# Altium PCB HalfPCB2.PcbDoc
Units mm, origin at the board's own origin, x right, y up, seen from the top; angles counter-clockwise.
Board outline 50.04 x 25.02 mm, 4 copper layers (Top Layer, Mid-Layer 1, Mid-Layer 2, Bottom Layer); 57 components, 74 nets, 214 pads, 79 vias.
Unrouted connection lines stored in the file: 3.
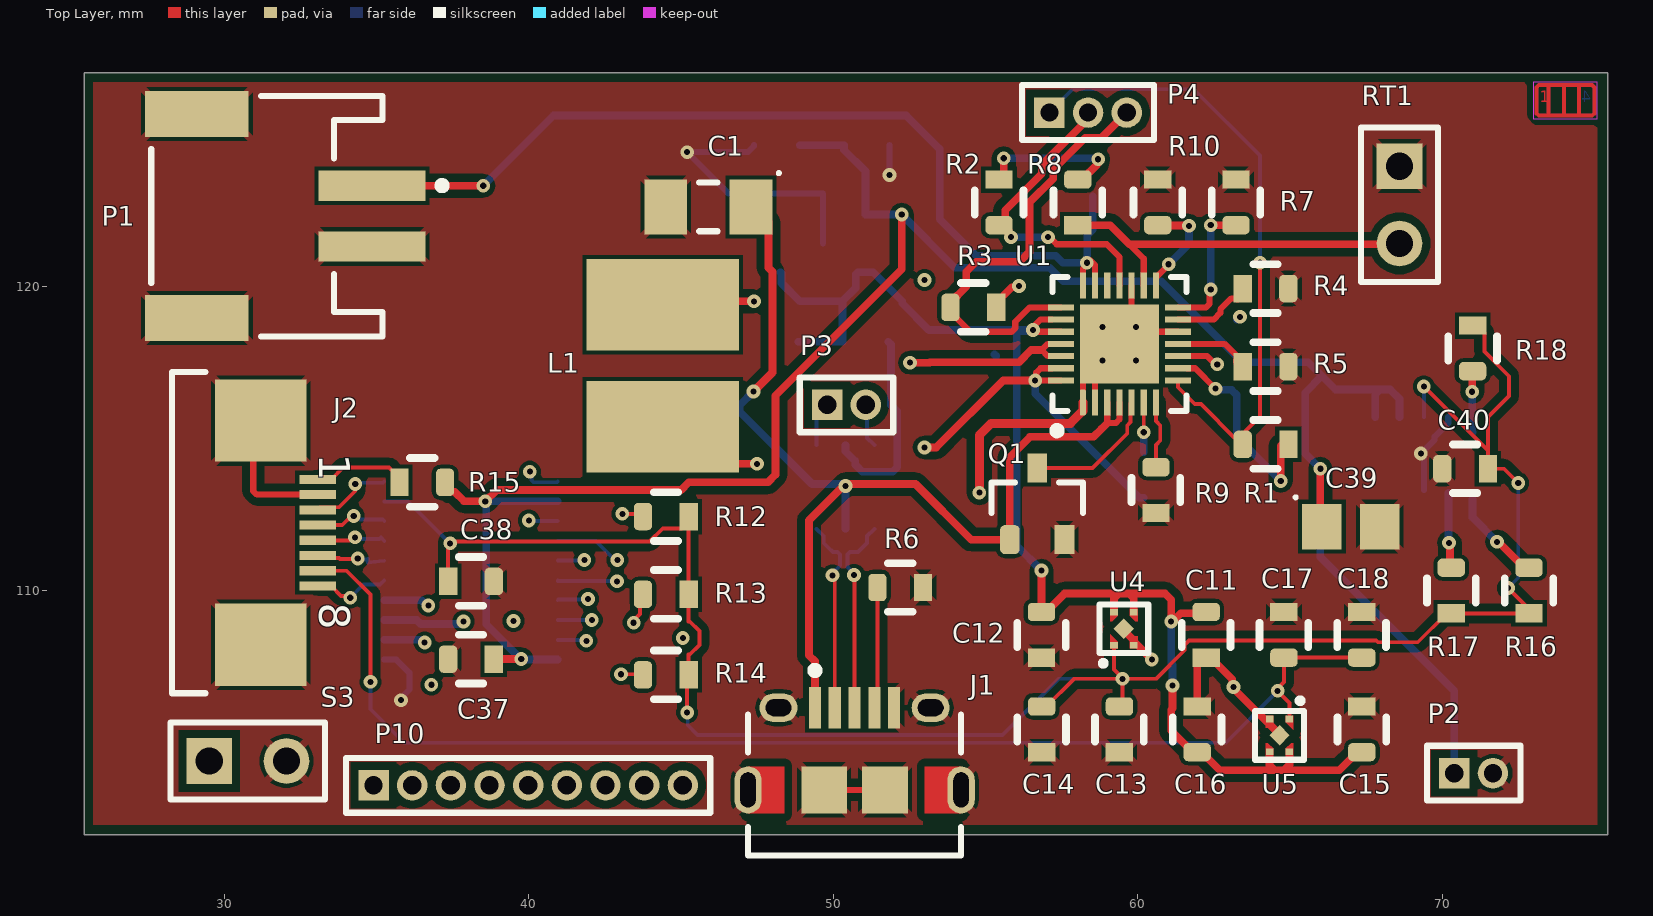
[diagram p0: Top Layer view]
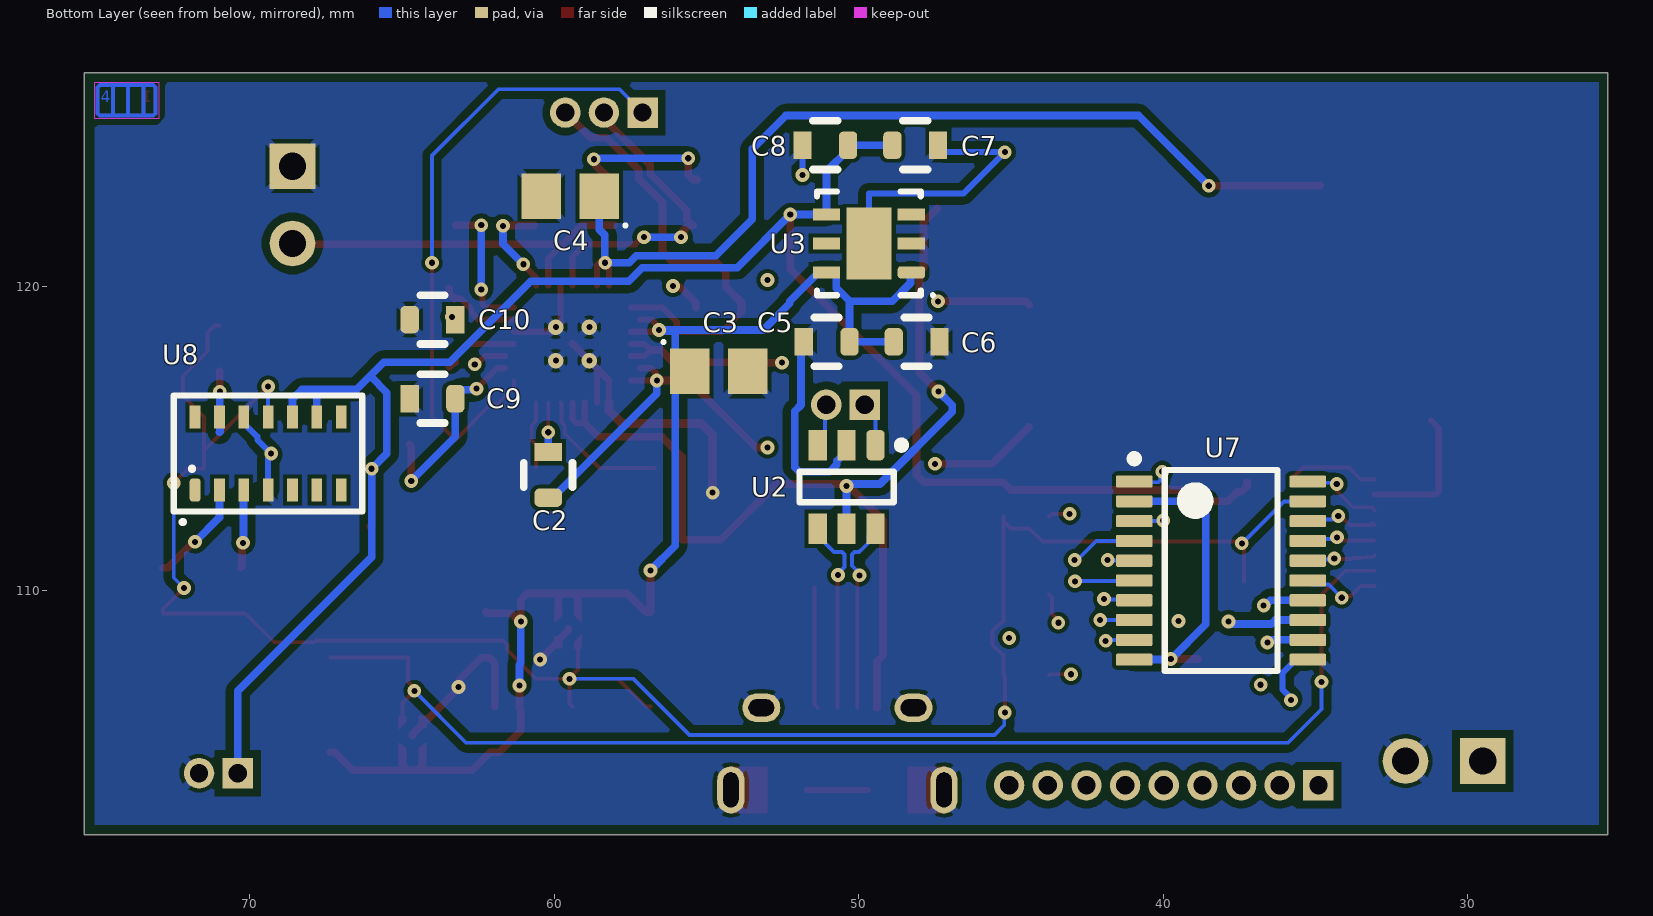
[diagram p1: Bottom Layer view, seen from below]
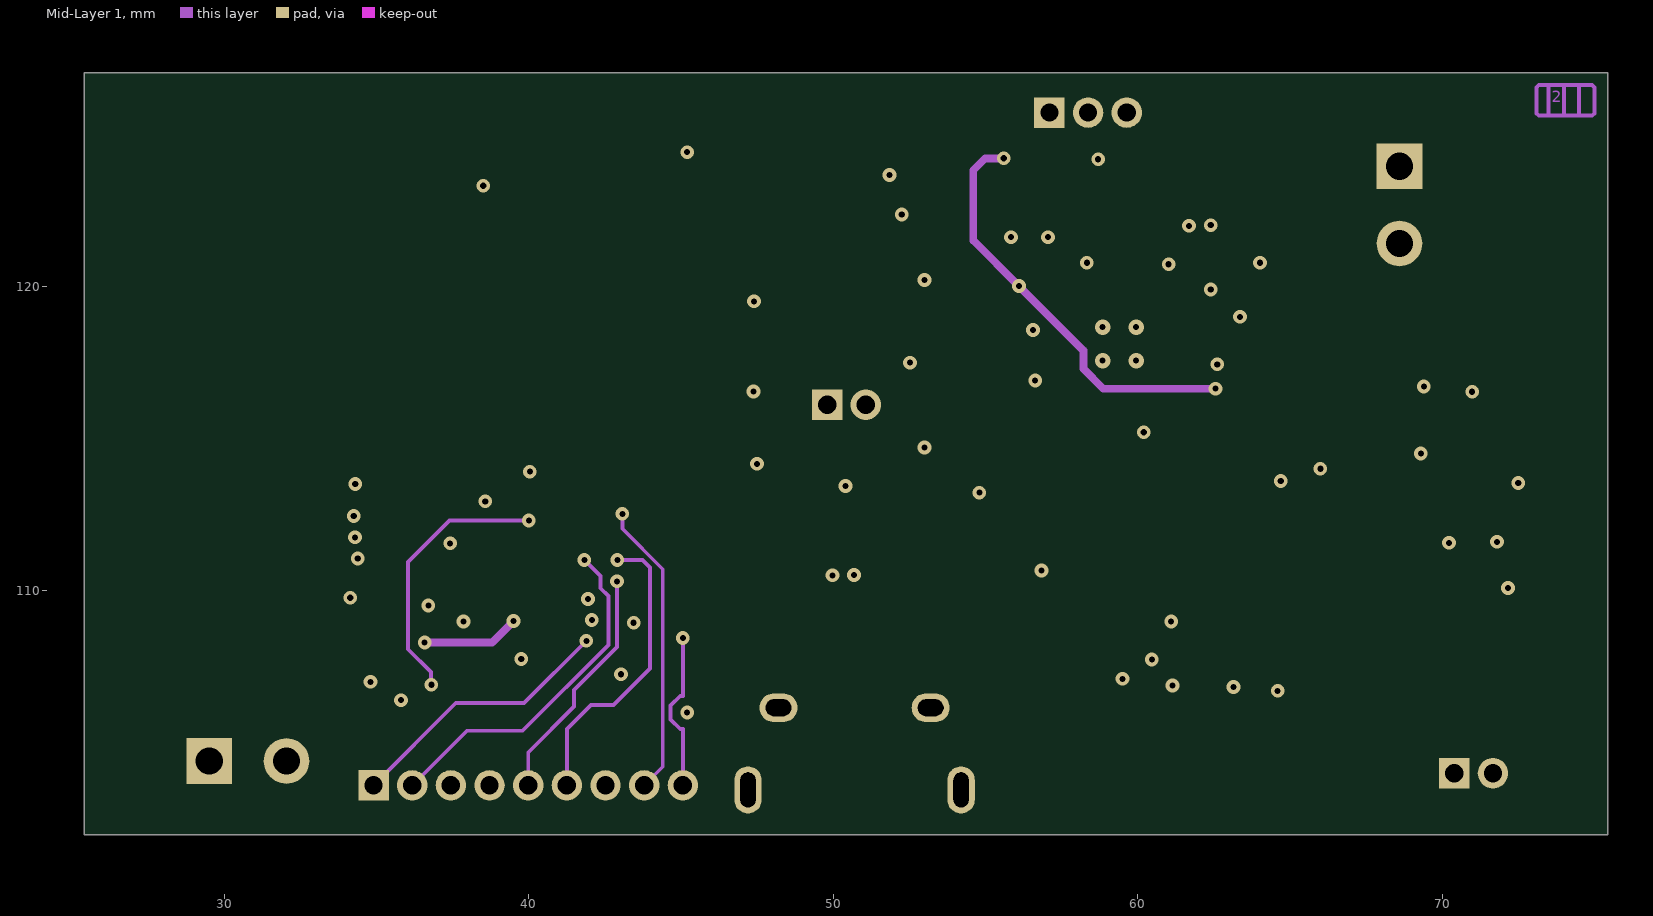
[diagram p2: Mid-Layer 1]
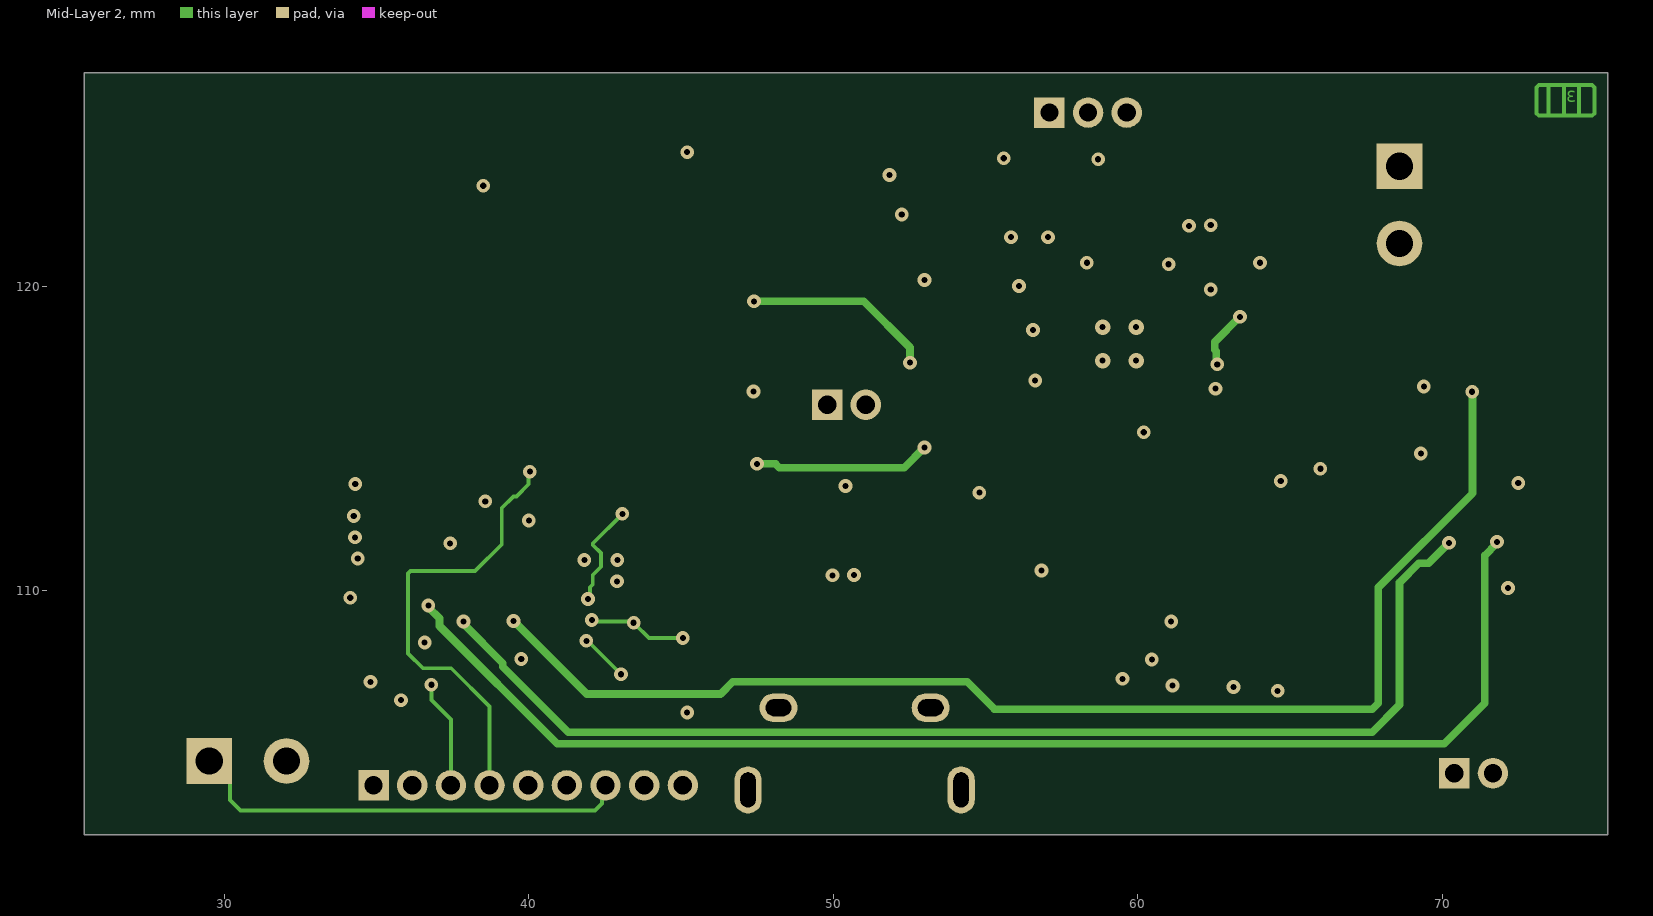
[diagram p3: Mid-Layer 2]
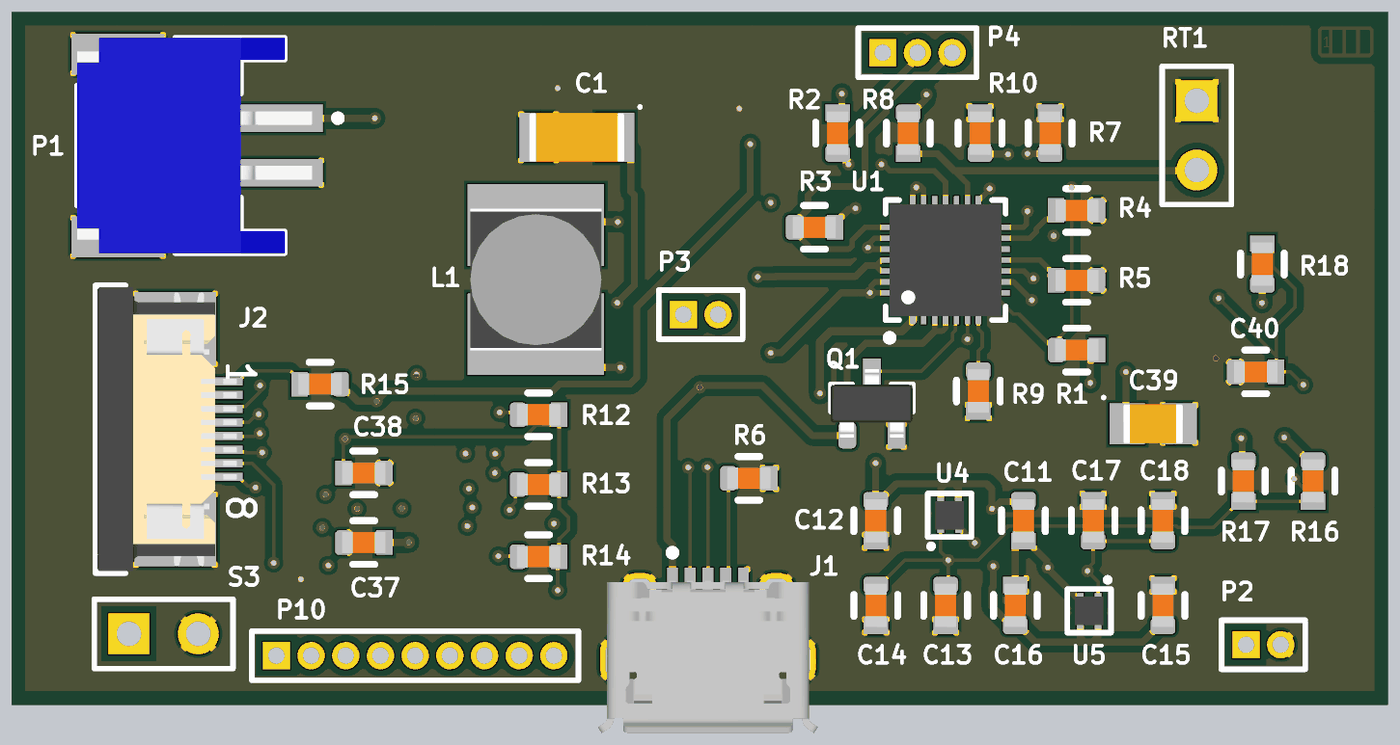
[diagram p4: 3D render of the assembled board from above, using the file's embedded part models]
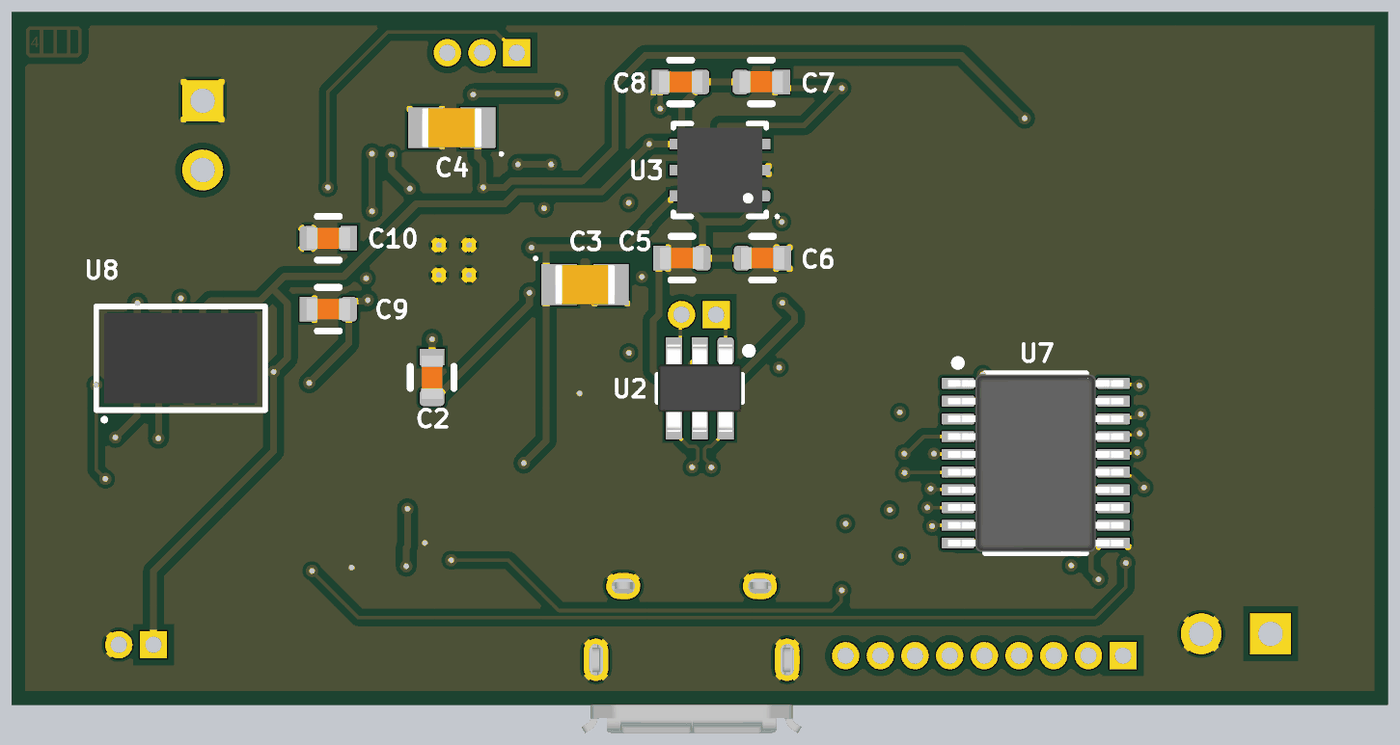
[diagram p5: 3D render of the assembled board from below, using the file's embedded part models]

## Layer stack, top to bottom
Top Solder: solder mask 0.0102, Solder Resist, Dk 3.5
Top Layer: signal copper 0.0356
Dielectric 1: dielectric 0.32, FR-4, Dk 4.8
Mid-Layer 1: signal copper 0.0356
Dielectric3: dielectric 0.32, FR-4, Dk 4.8
Mid-Layer 2: signal copper 0.0356
Dielectric2: dielectric 0.32, FR-4, Dk 4.8
Bottom Layer: signal copper 0.0356
Bottom Solder: solder mask 0.0102, Solder Resist, Dk 3.5

## Board outline
25.4,101.981 75.438,101.981 75.438,127 25.4,127

## Design rules (kind name [scope] priority, off if disabled: settings)
Clearance [All] p1: gap=0.254 ignorepadtopadclearanceinfootprint=TRUE except(0: Arc-Hole Track-Hole SMDPad-Hole THPad-Hole Via-Hole Fill-Hole Poly-Hole Region-Hole Text-Hole; 0.127: Arc-Arc Arc-Track Arc-Poly Track-Track SMDPad-SMDPad SMDPad-Poly SMDPad-Region THPad-Region Via-Fill Via-Poly; 0.2: Arc-SMDPad Arc-THPad Track-SMDPad Track-THPad SMDPad-Via; 0.5: THPad-THPad)
DiffPairsRouting [All] p1: maxlimit=0.254 minlimit=0.127 mostfreqgap=0.127 toplayer_minwidth=0.127 toplayer_maxwidth=0.381 toplayer_prefwidth=0.127 midlayer1_minwidth=0.127 midlayer1_maxwidth=0.381 midlayer1_prefwidth=0.127 midlayer2_minwidth=0.127 midlayer2_maxwidth=0.381 midlayer2_prefwidth=0.127 bottomlayer_minwidth=0.127 bottomlayer_maxwidth=0.381 bottomlayer_prefwidth=0.127 maxuncoupledlength=12.7
HoleSize [All] p1: absolutevalues=TRUE maxlimit=6.3 minlimit=0.2 maxpercent=80.000 minpercent=20.000
HoleToHoleClearance [All] p1: gap=0.5 allowstackedmicrovias=TRUE
MinimumSolderMaskSliver [All] p1: minsoldermaskwidth=0.1
PlaneClearance [All] p1: clearance=0.254
PlaneConnect [All] p1: planeconnectstyle=Relief reliefexpansion=0.508 reliefentries=4 reliefconductorwidth=0.254 reliefairgap=0.127
PolygonConnect PolygonConnect_2 [All vs (InNamedPolygon('GND_L01_P003') AND InNamedUnion('Via Stitchings'))] p1: connectstyle=Direct reliefconductorwidth=0.254 reliefentries=4 polygonreliefangle="90 Angle" airgapwidth=0.254
PolygonConnect PolygonConnect_1 [All vs (InNamedPolygon('GND_L01_P003') AND InNamedUnion('Via Stitchings'))] p2: connectstyle=Direct reliefconductorwidth=0.254 reliefentries=4 polygonreliefangle="90 Angle" airgapwidth=0.254
PolygonConnect [All] p3: connectstyle=Relief reliefconductorwidth=0.254 reliefentries=4 polygonreliefangle="45 Angle" airgapwidth=0.127
RoomDefinition U_IO [InComponentClass('U_IO')] p1: confinementstyle=ConfineIn formatcopy=TRUE lockcomponents=FALSE outline 27.686,102.235 74.295,102.235 74.295,119.634 27.686,119.634
RoomDefinition U_Power [InComponentClass('U_Power')] p2: confinementstyle=ConfineIn formatcopy=TRUE lockcomponents=FALSE outline 26.924,100.33 73.025,100.33 73.025,127 26.924,127
RoutingVias [All] p1: holewidth=0.3 width=0.5 viastyle="Through Hole" minholewidth=0.2 minwidth=0.45 maxholewidth=6.3 maxwidth=6.45
SilkToSolderMaskClearance [IsPad] p1: minsilkscreentomaskgap=0.02 clearancetoexposedcopper=TRUE
SolderMaskExpansion [All] p1: expansion=0.05 istentingtop=FALSE
UnRoutedNet [All] p1: checkbadconnections=TRUE
Width [All] p1: maxlimit=2 minlimit=0.127 preferedwidth=0.254
22 further rules are at their usual default settings.

## Classes and differential pairs
component class U_Power: C1 C2 C3 C4 C5 C6 C7 C8 C9 C10 C11 C12 C13 C14 C15 C16 C17 C18 J1 L1 P1 P2 P3 P4 Q1 R1 R2 R3 R4 R5 R6 R7 R8 R9 R10 RT1 U1 U2 U3 U4 U5
component class U_IO: C37 C38 C39 C40 J2 P10 R12 R13 R14 R15 R16 R17 R18 S3 U7 U8
differential pair USB: +USB_P -USB_N
differential pair USBSTM: +USBSTM_P -USBSTM_N
differential pair USBIN: +USBIN_P -USBIN_N

## Components (designator, comment, footprint, x,y, rotation, side; value= is the part's Value field where it differs from the comment)
C1 "4.7uF" C_1206 45.9,122.6 r0 top
C2 "100nF" C_0603 60.2,113.8 r90 bottom
C3 "10uF" C_0805 54.6,117.2 r0 bottom
C4 "10uF" C_0805 59.477,122.953 r180 bottom
C5 "100nF" C_0603 51.054,118.171 r0 bottom
C6 "1uF" C_0603 48.1,118.171 r180 bottom
C7 "1uF" C_0603 48.146,124.629 r180 bottom
C8 "100nF" C_0603 51.1,124.629 r0 bottom
C9 "1uF" C_0603 64,116.3 r0 bottom
C10 "150nF" C_0603 64,118.9 r180 bottom
C11 "100nF" C_0603 62.25,108.546 r270 top
C12 "1uF" C_0603 56.842,108.546 r270 top
C13 "1uF" C_0603 56.846,105.441 r270 top
C14 "100nF" C_0603 59.4,105.441 r270 top
C15 "100nF" C_0603 67.363,105.441 r90 top
C16 "1uF" C_0603 61.954,105.441 r90 top
C17 "1uF" C_0603 64.804,108.546 r90 top
C18 "100nF" C_0603 67.359,108.546 r90 top
C37 "100nF" C_0603 38.1,107.746 r0 top
C38 "100nF" C_0603 38.1,110.3 r180 top
C39 "10uF" C_0805 67,112.1 r180 top
C40 "1uF" C_0603 70.754,114 r0 top
J1 "MicroUSB" FCI-10118194-0001LF-5_V 50.7,104.8 r0 top
J2 "68710814522" 68710814522 30.5,111.9 r270 top
L1 "10mH" L_0503 44.4,117.384 r270 top
P1 "JST-PH" "JST- S2B-PH-SM4-TB(LF)(SN)-2_V" 31.4,122.3 r270 top
P2 "PWR" MHDR1X2 70.4,104 r0 top
P3 "UART" MHDR1X2 49.8,116.1 r0 top
P4 "BAT" MHDR1X3 57.1,125.7 r0 top
P10 "MHDR1X9" MHDR1X9 34.9,103.6 r0 top
Q1 "PMV37ENEAR" SOT23-3P90R290x240-N2 56.7,112.846 r90 top
R1 "10K" C_0603 64.2,114.8 r0 top
R2 "10K" C_0603 55.446,122.75 r90 top
R3 "10K" C_0603 54.6,119.3 r0 top
R4 "1K2" C_0603 64.2,119.919 r180 top
R5 "3K" C_0603 64.2,117.354 r180 top
R6 "10K" C_0603 52.2,110.1 r0 top
R7 "10K" C_0603 63.23,122.75 r90 top
R8 "10K" C_0603 58.033,122.75 r270 top
R9 "10K" C_0603 60.6,113.3 r270 top
R10 "10K" C_0603 60.662,122.75 r90 top
R12 "4K7" C_0603 44.5,112.429 r0 top
R13 "4K7" C_0603 44.5,109.875 r0 top
R14 "4K7" C_0603 44.5,107.229 r0 top
R15 "10K" C_0603 36.5,113.554 r180 top
R16 "4K7" C_0603 72.854,110 r270 top
R17 "4K7" C_0603 70.3,110 r270 top
R18 "4K7" C_0603 71,117.954 r90 top
RT1 "NTC" HDR1X2 68.6,123.94 r270 top
S3 "USR-BTN" HDR1X2 29.5,104.4 r0 top
U1 "MAX8903A" QFN28P40S400X400EP260x260 59.4,118.1 r90 top
U2 "USBLC6-2" SOT23-6P95R280X90 50.4,113.4 r270 bottom
U3 "LD39050PU33R" SON6P95S300X300EP237x149 49.665,121.4 r0 bottom
U4 "MIC5502-1.8YMT" DFN4P65S100x100EP48x48 59.546,108.746 r0 top
U5 "MIC5502-2.8YMT" DFN4P65S100x100EP48x48 64.659,105.241 r180 top
U7 "TXB0108PWR" PW0020A_L 38.1,110.654 r180 bottom
U8 "MAX3010x" OESIP14R560x330 69.4,114.5 r90 bottom

## Footprints (in the part's own frame and the unit in brackets; to place one, negate y for a bottom-side part, rotate by r counter-clockwise, add the part's x,y. Pads: shape width x height; smd on the part's side, far side on the other; paste and mask are expansions set on the pad)
68710814522 [mm] "ZIF Connectors, Horizontal, Bottom Contact, pitch 0.5mm, 8p"
  rect 0.3x1.2 smd: 1(-1.75,2.56) 2(-1.25,2.56) 3(-0.75,2.56) 4(-0.25,2.56) 5(0.25,2.56) 6(0.75,2.56) 7(1.25,2.56) 8(1.75,2.56)
  rect 2.7x3 smd: MP1(-3.68,0.7) MP2(3.68,0.7)
  silkscreen extent -5.27,-2.22 5.28,-1.12, body extent -5.2,-2.15 5.2,2.95, height 2.1
C_0603 [mm] "0603 package for CAP"
  rrect50% 0.6x0.9 smd: 1(-0.75,0)
  rect 0.6x0.9 smd: 2(0.75,0)
  silkscreen extent -0.4,-0.8 0.4,0.8, body extent -0.8,-0.4 0.8,0.4, height 0.5
C_0805 [mm] "0805 package for CAP"
  rect 1.3x1.5 smd: 1(-0.95,0) 2(0.95,0)
  silkscreen extent 1.76,-1.01 1.86,-0.91, body extent -1.1,-0.72 1.1,0.72, height 1.45
C_1206 [mm]
  rect 1.4x1.8 smd: 1(-1.4,0) 2(1.4,0)
  silkscreen extent -0.3,-0.8 2.36,1.16, body extent -1.75,-0.9 1.75,0.9, height 1.6
DFN4P65S100x100EP48x48 [mm] "DFN, 4-Leads, Body 1.00x1.00mm, Pitch 0.65mm, Thermal Pad 0.48x0.48mm, IPC Medium Density"
  rect 0.25x0.22 smd paste+0 mask+0.102: 1(-0.325,-0.54) 2(0.325,-0.54) 3(0.325,0.54) 4(-0.325,0.54)
  rect 0.48x0.48 smd rot 135: 5(0,0)
  Top Layer region: -0.45,0.65 -0.45,0.25 -0.38,0.25 -0.2,0.43 -0.2,0.65
  Top Layer region: 0.45,0.65 0.45,0.25 0.38,0.25 0.2,0.43 0.2,0.65
  Top Layer region: 0.45,-0.65 0.45,-0.25 0.38,-0.25 0.2,-0.43 0.2,-0.65
  Top Layer region: -0.45,-0.65 -0.45,-0.18 -0.2,-0.43 -0.2,-0.65
  silkscreen extent -0.8,-1.19 0.8,0.8, body extent -0.52,-0.52 0.53,0.53, height 0.6
FCI-10118194-0001LF-5_V [mm] "SMD, 5-Leads, Body 7x5mm, Pitch 0.65 mm"
  rect 0.4x1.35 smd: 1(-1.3,1.35) 2(-0.65,1.35) 3(0,1.35) 4(0.65,1.35) 5(1.3,1.35)
  oval 1.25x0.95 hole 0.55 slot 0.85 at 0 deg: 6(-2.5,1.35) 7(2.5,1.35)
  oval 0.9x1.55 hole 0.5 slot 1.15 at 90 deg: 8(-3.5,-1.35) 9(3.5,-1.35)
  rect 1.5x1.55 smd: 10(-1,-1.35) 11(1,-1.35)
  Top Layer region: 3.501,-2.124 3.501,-0.574 2.301,-0.574 2.301,-2.124
  Top Layer region: -2.3,-2.124 -2.3,-0.574 -3.5,-0.574 -3.5,-2.124
  silkscreen extent -3.5,-3.5 3.5,2.7, body extent -4.02,-4.03 4.02,1.55, height 2.72
HDR1X2 [mm] "Connector; Header; 2 Position"
  rect 1.5x1.5 hole 0.9: 1(0,0)
  round 1.5 hole 0.9: 2(2.54,0)
  silkscreen extent -1.27,-1.27 3.81,1.27
"JST- S2B-PH-SM4-TB(LF)(SN)-2_V" [mm] "SMD, 2-Leads, Body 7.9x7.6mm, Pitch 2mm"
  rect 1x3.5 smd: 1(-1,3.45) 2(1,3.45)
  rect 1.5x3.4 smd: MP1(-3.35,-2.3) MP2(3.35,-2.3)
  silkscreen extent -3.95,-3.8 3.95,5.88, body extent -3.95,-3.8 3.95,4.8, height 5.6
L_0503 [mm] "Precision wire bound inductor"
  rect 3x5 smd: 1(-2,0) 2(2,0)
  body extent -2.6,-2.4 2.6,2.4, height 3.4
MHDR1X2 [mm] "Connector; Header; 2 Position"
  rect 1x1 hole 0.6: 1(0,0)
  round 1 hole 0.6: 2(1.27,0)
  silkscreen extent -0.9,-0.9 2.17,0.9
MHDR1X3 [mm] "Connector; Header; 3 Position"
  rect 1x1 hole 0.6: 1(0,0)
  round 1 hole 0.6: 2(1.27,0) 3(2.54,0)
  silkscreen extent -0.9,-0.9 3.44,0.9
MHDR1X9 [mm] "Connector; Header; 9 Position"
  rect 1x1 hole 0.6: 1(0,0)
  round 1 hole 0.6: 2(1.27,0) 3(2.54,0) 4(3.81,0) 5(5.08,0) 6(6.35,0) 7(7.62,0) 8(8.89,0) 9(10.16,0)
  silkscreen extent -0.9,-0.9 11.06,0.9
OESIP14R560x330 [mm] "14 pin OESIP 5.6mm by 3.3 mm"
  rrect50% 0.75x0.35 smd: 1(-1.2,2.4)
  rect 0.75x0.35 smd: 2(-1.2,1.6) 3(-1.2,0.8) 4(-1.2,0) 5(-1.2,-0.8) 6(-1.2,-1.6) 7(-1.2,-2.4) 8(1.2,-2.4) 9(1.2,-1.6) 10(1.2,-0.8) 11(1.2,0) 12(1.2,0.8) 13(1.2,1.6) 14(1.2,2.4)
  silkscreen extent -2.26,-3.09 1.9,3.1, body extent -1.65,-2.8 1.65,2.8, height 1.55
PW0020A_L [mm] "SOP, 20-Leads, Body 6.6x4.5mm, Pitch 0.65mm, IPC High Density"
  rrect25% 1.2x0.4 smd: 1(-2.85,2.925) 2(-2.85,2.275) 3(-2.85,1.625) 4(-2.85,0.975) 5(-2.85,0.325) 6(-2.85,-0.325) 7(-2.85,-0.975) 8(-2.85,-1.625) 9(-2.85,-2.275) 10(-2.85,-2.925) 11(2.85,-2.925) 12(2.85,-2.275) 13(2.85,-1.625) 14(2.85,-0.975) 15(2.85,-0.325) 16(2.85,0.325) 17(2.85,0.975) 18(2.85,1.625) 19(2.85,2.275) 20(2.85,2.925)
  silkscreen extent -2.98,-3.3 1.85,3.8, body extent -3.21,-3.25 3.21,3.25, height 1
QFN28P40S400X400EP260x260 [mm] "QFN, 28-Leads, Body 4.00x4.00mm, Pitch 0.40mm, Thermal Pad 2.60x2.60mm, IPC Medium Density"
  rrect50% 0.85x0.2 smd: 1(-1.925,1.2)
  rect 0.85x0.2 smd: 2(-1.925,0.8) 3(-1.925,0.4) 4(-1.925,0) 5(-1.925,-0.4) 6(-1.925,-0.8) 7(-1.925,-1.2) 15(1.925,-1.2) 16(1.925,-0.8) 17(1.925,-0.4) 18(1.925,0) 19(1.925,0.4) 20(1.925,0.8) 21(1.925,1.2)
  rect 0.2x0.85 smd: 8(-1.2,-1.925) 9(-0.8,-1.925) 10(-0.4,-1.925) 11(0,-1.925) 12(0.4,-1.925) 13(0.8,-1.925) 14(1.2,-1.925) 22(1.2,1.925) 23(0.8,1.925) 24(0.4,1.925) 25(0,1.925) 26(-0.4,1.925) 27(-0.8,1.925) 28(-1.2,1.925)
  rect 2.6x2.6 smd: 29(0,0)
  silkscreen extent -2.97,-2.2 2.2,2.2, body extent -2.05,-2.05 2.05,2.05, height 0.8
SON6P95S300X300EP237x149 [mm] "SON, 6-Leads, Body 3.00x3.00mm, Pitch 0.95mm, Thermal Pad 2.37x1.49mm, IPC Medium Density"
  rrect50% 0.9x0.4 smd: 1(-1.395,0.95)
  rect 0.9x0.4 smd: 2(-1.395,0) 3(-1.395,-0.95) 4(1.395,-0.95) 5(1.395,0) 6(1.395,0.95)
  rect 1.49x2.37 smd: 7(0,0)
  silkscreen extent -2.15,-1.7 1.7,1.75, body extent -1.55,-1.55 1.55,1.55, height 1
SOT23-3P90R290x240-N2 [mm] "SOT23, 3-Leads, Body 2.90x2.4mm, Pitch 0.90mm, IPC Medium Density"
  rrect50% 0.95x0.65 smd: 1(-1.175,0.9)
  rect 0.95x0.65 smd: 2(1.175,0) 3(-1.175,-0.9)
  silkscreen extent -0.3,-1.5 0.7,1.5, body extent -1.25,-1.5 1.25,1.5, height 1.1
SOT23-6P95R280X90 [mm] "SOT23, 6-Leads, Body 2.93x2.80mm, Pitch 0.95mm, IPC Medium Density"
  rrect50% 1x0.6 smd: 1(-1.375,0.95)
  rect 1x0.6 smd: 2(-1.375,0) 3(-1.375,-0.95) 4(1.375,-0.95) 5(1.375,0) 6(1.375,0.95)
  silkscreen extent -1.5,-1.55 0.5,1.92, body extent -1.6,-1.53 1.6,1.52, height 0.9

## Part data
C1 C2 C3 C4 C5 C6 C7 C8 C9 C10 C11 C12 C13 C14 C15 C16 C17 C18 C37 C38 C39 C40: library part Cap, "Capacitor", LatestRevisionDate=17-Jul-2002, LatestRevisionNote="Re-released for DXP Platform.", PackageDescription="Radial Cap, Thru-Hole; 2 Leads; 0.3 in Pin Spacing", PackageReference=RAD-0.3, Published=8-Jun-2000, Publisher="Altium Limited"
J1: library part CMP-2000-05120-1, "Micro USB B Type Receptacle, 1.8 A, -55 to 85 degC, 5-Pin SMD, RoHS, Tape and Reel", Manufacturer="Amphenol FCI", Package Description="5-Pin Surface Mount Device, Body 8.05 x 5.53 mm, Pitch 0.65 mm", Package Reference=10118194-0001LF-5, Body Orientation=RightAngle, Datasheet URL=https://datasheet.ciiva.com/26945/getdatasheetpartid-418619-26945695.pdf, Datasheet Version="Rev. A, 10/2011", Gender=RCP, Manufacturer URL=http://www.fci.com/, Mounting=SurfaceMount, Number of Contacts=5, Packaging=CutTape, Pitch=0.65mm, Rad Hard=No, Termination Method=Solder, Type=MicroUSBTypeB
J2: library part CMP-1502-01528-1, "SMT ZIF Connectors WR-FPC, Horizontal, Bottom Contact, pitch 0.5 mm, 8 pins", Contact Resistance=20mOhm, Manufacturer="Wurth Elektronik", Operating Temperature=-25to85degC, Rated Current=0.5A, Withstanding Voltage=250VAC, Working Voltage=50VAC, Contact Design=BottomContact, Datasheet URL=https://katalog.we-online.de/em/datasheet/68710814522.pdf, Manufacturer URL=http://www.we-online.de, Mounting Technology=SMT, Orientation=Horizontal, Package Reference=68710814522, Packaging=TapeandReel, Part Number=68710814522, Pin Number=8, Pitch=0.5mm, Publisher=WurthElektronik
L1: library part Inductor, "Inductor", Code_IEC=1005, Code_JEITA=0402, LatestRevisionDate=29-May-2009, LatestRevisionNote="IPC-7351 Footprint Added.", PackageDescription="Chip Inductor", PackageReference=0402-A, Published=8-Jun-2000, Publisher="Altium Limited"
P1: library part CMP-1755-00001-1, "Male Header, Pitch 2 mm, 1 x 2 Position, Height 5.5 mm, -25 to 85 degC, RoHS, Tape and Reel", Colour=Black, Current Rating="3 A", Max Operating Temperature=105degC, Min Operating Temperature=-65degC, Package Quantity=100, ComponentLink1Description="Manufacturer URL", ComponentLink1URL=http://www.jst.com/home2.html, ComponentLink2Description=Datasheet, ComponentLink2URL=http://www.jst-mfg.com/product/pdf/eng/ePH.pdf, Contact Finish=Lead, Contact Material=Bronze, Contact Plating=Tin, DatasheetVersion=Dec-12, Height="8.13 mm", Lead Pitch="0.1 inch", Length="101.19 mm", Mount="Through Hole", PackageDescription="Male Header, Pitch 2 mm, 1 x 2 Position, Height 5.5 mm", PackageReference=S2B-PH-SM4-TB(LF)(SN)-2, Packaging=Bulk, Pins=40, Radiation Hardening=No, RoHSCompliant=True, Width="2.34 mm"
P2 P3: library part MHDR1X2, "Header, 2-Pin", LatestRevisionDate=17-Jul-2002, LatestRevisionNote="Re-released for DXP Platform.", Publisher="Altium Limited"
P4: library part MHDR1X3, "Header, 3-Pin", LatestRevisionDate=17-Jul-2002, LatestRevisionNote="Re-released for DXP Platform.", Publisher="Altium Limited"
P10: "Header, 9-Pin", LatestRevisionDate=17-Jul-2002, LatestRevisionNote="Re-released for DXP Platform.", Publisher="Altium Limited"
Q1: library part NMOS-2, "N-Channel Power MOSFET", ComponentLink1Description="Manufacturer Link", ComponentLink1URL=http://www.irf.com/, DatasheetVersion=PD-9.814, LatestRevisionDate=17-Jul-2002, LatestRevisionNote="Re-released for DXP Platform.", Note="Pin 2 is electrically connected to pin 4.", PackageDescription="TO, Thru-Hole, Vertical, Heatsink Mounted; 3 In-Line Leads; Pitch 2.54 mm", PackageReference=TO-220AB, PackageVersion=Feb-1997, Published=8-Jun-2000, Publisher="Altium Limited"
R1 R2 R3 R4 R5 R6 R7 R8 R9 R10 R12 R13 R14 R15 R16 R17 R18: library part Res1, "Resistor", LatestRevisionDate=17-Jul-2002, LatestRevisionNote="Re-released for DXP Platform.", PackageDescription="Axial Device, Thru-Hole; 2 Leads; 0.3 in Pin Spacing", PackageReference=AXIAL-0.3, Published=8-Jun-2000, Publisher="Altium Limited"
RT1: library part NTC/PTC, "2322-640-63103"
S3: library part SW-SPST, "Single-Pole, Single-Throw Switch", LatestRevisionDate=17-Jul-2002, LatestRevisionNote="Re-released for DXP Platform.", PackageDescription="Switch; 2 Leads", PackageReference=SPST-2, Published=24-Mar-1999, Publisher="Altium Limited"
U1: "2A 1-Cell Li+ DC-DC Chargersfor USB and Adapter Power"
U2: "Very low capacitance ESD protection"
U3: library part LD39050PUxxR, "500 mA low quiescent current and low noise voltage regulator"
U4 U5: library part MIC550x-x.xYMT, "Single 300mA LDO"
U7: library part CMP-2000-07337-1, "TXB0108 8-Bit Bidirectional Voltage-Level Translator with Auto-Direction Sensing and / +/- 15-kV ESD Protection, 1.2 to 3.6 V, -40 to 85 degC, 20-Pin TSSOP (PW), Green (RoHS & no Sb/Br), Tape and Reel", Manufacturer="Texas Instruments", Operating Temperature=-40°C~85°C, Package / Case="20-TSSOP(0.173\",4.40mmWidth)", Package Description="20-Pin Small Outline Package Integrated Circuit, Body 6.5 x 4.4 mm, Pitch 0.65 mm", Package Reference=PW20, Package Version="4040064-5/G, 02/2011", Standard Package=1, Supplier Device Package=20-TSSOP, Voltage - Supply=1.2V~3.6V,1.65V~5.5V, Category=IntegratedCircuits(ICs), Data Rate=100Mbps, Datasheet URL=http://www.ti.com/general/docs/lit/getliterature.tsp?genericPartNumber=TXB0108&fileType=pdf, Datasheet Version="Rev. F, 12/2014", Differential - Input=Output:No/No, Dynamic Catalog=TXBSeries, Family=Logic-Translators, Input Type=Logic, Logic Function=Translator,Bidirectional, Manufacturer URL=http://www.ti.com/, Mounting Technology=SurfaceMount, Number of Bits=8, Number of Channels=8, Number of Outputs/Channel=1, Other Names=296-21527-6, Output Type=Logic, Package URL=http://www.ti.com/litv/pdf/mpds362, Packaging=Digi-Reel®, Product Training Modules=VoltageLevelTranslation, Propagation Delay (Max)=4ns, Series=-
U8: "Pulse Oximeter and Heart-Rate Sensor IC  for Wearable Health"

## Via types
v1: diameter 0.45, hole 0.2, Top Layer to Bottom Layer, tented both sides, 74 vias
v2: diameter 0.5, hole 0.2, Top Layer to Bottom Layer, 4 vias
v3: diameter 0.45/0.45/0.45/0.45 (per signal layer), hole 0.2, Top Layer to Bottom Layer, tented both sides, 1 vias

## Nets (pads, with @x,y where several pads share a name; then routed paths per layer and width w, separated by ;. In a path a pad name is that pad's centre, name@x,y a point inside that pad or via, vN(x,y) a via of type N, cw(c..) or ccw(c..) an arc to the next point about the centre after c; other vN are vias at no path point)
30100_nINT: P10.1 R14.1 U7.9 | length 12.3
  Top Layer w0.127: v1(43.029,107.25) 43.729,107.25 R14.1
  Mid-Layer 1 w0.127: P10.1 37.6,106.3 39.843,106.3 v1(41.891,108.348)
  Mid-Layer 2 w0.127: v1(41.891,108.348) 41.93,108.348 v1(43.029,107.25)
  Bottom Layer w0.127: U7.9 41.9,108.379 41.9,108.357 v1(41.891,108.348)
30100_nINT_1V8: R18.1 U7.12 U8.13 | length 48.1
  Top Layer w0.254: v1(70.986,116.528) 70.993,116.535 70.993,117.197 R18.1
  Mid-Layer 1 w0.254: v1(36.58,108.294) 38.794,108.294 v1(39.5,109)
  Mid-Layer 2 w0.254: v1(39.5,109) 41.9,106.6 46.3,106.6 46.7,107 54.4,107 55.3,106.1 67.7,106.1 67.9,106.3 67.9,110.1 71,113.2 71,116.514 v1(70.986,116.528)
  Bottom Layer w0.254: U7.12 36.442,108.379 36.527,108.294 v1(36.58,108.294) ; v1(70.986,116.528) 70.993,116.521 70.993,115.712 70.981,115.7 70.981,115.219 71,115.2
30100_nINT_STM: 
+1V8: C13.1 C14.1 C38.2 C40.2 R12.2 R13.2 R14.2 R16.2 R17.2 R18.2 U4.1 U7.19 U8.11 | length 69.7
  Top Layer w0.127: C38.2 v1@37.35,111.549 ; v1(37.416,111.549) v1@37.35,111.549 ; v1(45.2,105.994) 45.2,107.179 R14.2 45.25,107.898 45.285,107.898 45.602,108.215 45.602,108.665 45.285,108.983 45.25,108.983 R13.2 R12.2@45.25,112.279 ; R12.2 R12.2@45.25,112.279 ; C13.1 56.996,106.191 57.904,107.1 v1(59.5,107.1) ; U4.1 59.221,107.409 59.5,107.13 v1(59.5,107.1) ; C14.1 59.5,106.291 v1(59.5,107.1) ; v1(69.4,116.7) 71.504,114.596 ; R18.2 71.15,118.704 71.387,118.468 71.387,117.853 72.2,117.039 72.2,116.391 71.504,115.695 71.504,114.596 ; v1(72.162,110.08) 72.854,109.388 R16.2 R17.2 70.15,109.25 69.2,108.3 67.889,108.3 67.83,108.359 61.859,108.359 61.691,108.359 61.537,108.205 61.537,108.037 60.6,107.1 v1(59.5,107.1) ; v1(72.5,113.529) 72.029,114 C40.2 71.504,114.596 ; v1@37.35,111.549 37.35,111.615 43.97,111.615 44.398,112.043 45.013,112.043 R12.2@45.25,112.279
  Bottom Layer w0.127: U7.19 36.035,112.929 v1(37.416,111.549) ; v1(45.2,105.994) 45.221,105.972 45.221,105.578 45.546,105.254 55.554,105.254 57.4,107.1 v1(59.5,107.1) ; U8.11 v1(69.4,116.7) ; v1(72.162,110.08) 72.5,110.418 v1(72.5,113.529)
+2V8: C17.1 C18.1 J2.7 U5.1 | length 41.6
  Top Layer w0.127: J2.7 34.014,110.65 34.8,109.864 v1(34.8,107) ; U5.1 64.983,106.31 64.596,106.696 64.596,106.784 64.804,106.992 C17.1 C18.1
  Bottom Layer w0.127: v1(34.8,107) 34.8,106.1 35.9,105 62.9,105 64.596,106.696 v1(64.596,106.706)
+3V3: C7.1 C8.1 C37.2 C39.2 P2.1 R15.1 U3.4 U7.2 U7.10 U8.9 U8.10 | length 74.9
  Top Layer w0.254: R15.1 37.25,113.417 37.421,113.245 37.559,113.245 37.875,112.929 v1(38.571,112.929) 38.941,113.3 45,113.3 45.257,113.557 47.857,113.557 48.1,113.8 48.1,116.4 52.25,120.55 v1(52.25,122.35) ; C37.2 38.857,107.753 v1(39.753,107.753) ; v1(66,114) 66,112.15 C39.2
  Bottom Layer w0.254: v1@39.746,107.746 39.754,107.738 40.942,107.738 U7.10 ; v1(39.753,107.753) 39.739,107.753 38.6,108.892 38.6,112.9 v1(38.571,112.929) U7.2 ; C7.1 C8.1 50.35,124.479 51.06,123.769 U3.4 v1(52.25,122.35) 53.994,120.606 57.109,120.606 57.554,120.161 60.777,120.161 63.438,117.5 65.6,117.5 66.05,117.05 ; U8.9 67.8,116.451 67.949,116.6 ; U8.10 68.6,116.3 68.3,116.6 67.949,116.6 ; P2.1 70.4,106.7 66,111.1 v1(66,114) 65.5,114.5 65.5,116.5 66.05,117.05 ; 66.05,117.05 66.5,116.6 67.949,116.6
CHARGEINDICATOR: P4.3 R3.1 U1.22 | length 14.4
  Top Layer w0.2: R3.1@53.85,119.15 54.5,118.5 55.86,118.5 55.977,118.617 55.977,118.829 56.448,119.3 U1.22
  Top Layer w0.254: R3.1@53.85,119.15 R3.1 53.85,119.462 54.368,119.98 54.368,120.468 54.7,120.8 56.126,120.8 56.448,121.122 56.448,122.751 57.228,123.531 57.228,123.82 58.282,124.873 58.813,124.873 P4.3
CHARGEINDICATOR_STM: 
D_CLK: J2.6 U7.16 | length 2.4
  Top Layer w0.127: J2.6 33.063,111.147 33.1,111.11 33.644,111.072 33.769,111.063 33.795,111.038 34.37,111.038 v1(34.382,111.049)
  Bottom Layer w0.127: v1(34.382,111.049) 34.417,111.014 34.713,111.014 34.713,111.037 34.713,110.926 U7.16
D_CS: J2.8 U7.15 | length 2.6
  Top Layer w0.127: J2.8 33.51,110.15 33.835,109.825 34.072,109.825 v1(34.134,109.763)
  Bottom Layer w0.127: v1(34.134,109.763) 34.564,110.193 35.114,110.193 U7.15
D_RESET: J2.3 U7.20 | length 2.7
  Top Layer w0.127: J2.3 33.146,112.736 33.769,112.736 34.3,113.267 v1(34.3,113.5)
  Bottom Layer w0.127: v1(34.3,113.5) 34.34,113.54 35.21,113.54 U7.20
D_RS: J2.4 U7.18 | length 2.4
  Top Layer w0.127: J2.4 33.127,112.217 33.195,112.15 33.873,112.15 34.173,112.45 v1(34.25,112.45)
  Bottom Layer w0.127: v1(34.25,112.45) 34.337,112.45 34.459,112.328 35.201,112.328 U7.18
D_SDA: J2.5 U7.17 | length 2.3
  Top Layer w0.127: J2.5 33.07,111.64 34.096,111.64 34.203,111.747 v1(34.291,111.747)
  Bottom Layer w0.127: v1(34.291,111.747) 34.35,111.688 35.095,111.688 35.143,111.736 U7.17
DCPWROK: P4.1 R1.1 U1.8 | length 20.7
  Top Layer w0.127: U1.8 61.325,116.675 61.876,116.124 62.076,116.124 63.25,114.95 64.016,115.716 v1(64.016,120.767)
  Bottom Layer w0.127: P4.1 57.864,126.464 61.836,126.464 64.016,124.284 v1(64.016,120.767)
DCPWROK_STM: 
DISPLAY_RESET: P10.4 U7.1 | length 16.1
  Mid-Layer 2 w0.127: P10.4 38.71,106.19 37.451,107.449 36.526,107.449 36.038,107.937 36.038,110.563 36.112,110.638 38.238,110.638 39.113,111.513 39.113,112.713 39.493,113.093 39.592,113.093 39.989,113.49 39.989,113.861 v1(40.034,113.906)
  Bottom Layer w0.127: v1(40.034,113.906) 40.085,113.855 40.085,113.632 40.16,113.557 40.928,113.557 U7.1
DISPLAY_RESET_STM: 
DISPLAY_RS: P10.3 U7.3 | length 13.4
  Mid-Layer 1 w0.127: v1(36.8,106.906) 36.785,106.921 36.785,107.322 36.038,108.069 36.038,110.938 37.4,112.3 v1(40,112.3)
  Mid-Layer 2 w0.127: v1(36.8,106.906) 36.8,106.4 37.44,105.76 P10.3
  Bottom Layer w0.127: v1(40,112.3) 40.01,112.29 40.94,112.29 U7.3
DISPLAY_RS_STM: 
FAULTOUT: P4.2 R2.1 U1.18 | length 10.3
  Top Layer w0.2: v1@57.107,121.606 57.34,121.373 58.984,121.373 59.4,120.957 U1.18
  Top Layer w0.254: R2.1 55.583,122 55.755,121.829 55.755,121.746 55.842,121.659 v1(55.842,121.606) ; R2.1@55.477,122 55.648,122.171 55.648,122.49 56.847,123.689 56.847,123.977 58.37,125.5 P4.2 ; v1(57.054,121.606) v1@57.107,121.606
  Bottom Layer w0.254: v1(55.842,121.606) v1(57.054,121.606)
FAULTOUT_STM: 
GND: C1.1 C3.1 C4.1 C5.2 C6.2 C7.2 C8.2 C9.2 C10.1 C11.2 C12.2 C13.2 C14.2 C15.2 C16.2 C17.2 C18.2 C37.1 C38.1 C39.1 C40.1 J1.5 J1.6 J1.7 J1.8 J1.9 J1.10 J1.11 J2.2 J2.MP1 J2.MP2 P1.2 P1.MP1 P1.MP2 P2.2 Q1.3 R4.1 R5.1 R6.2 R7.2 R9.2 R10.2 RT1.1 S3.2 U1.1 U1.2 U1.12 U1.17 U1.29 U2.2 U3.2 U3.7 U4.2 U4.5 U5.2 U5.5 U7.11 U8.4 U8.12 | length 46.9
  Top Layer w0.2: J2.MP1 30.95,115.33 30.95,113.267 31.067,113.15 J2.2 ; J1.10 J1.11 ; U1.1 U1.29@58.2,116.9 ; U1.2 U1.29@58.6,117.3 ; U1.29@59.8,118.8 U1.17 ; U1.29@60.1,118.5 U1.12
  Top Layer w0.254: U1.29@58.227,116.927 58.6,117.3 v2(58.85,117.55) U1.29 ; U4.5 59.546,108.696 59.871,108.371 ; U1.29@59.8,118.8 v2(59.95,118.65) U1.29@60.1,118.5 ; U4.2@59.9,108.3 v1(60.466,107.734) ; C16.2 61.954,107.623 62.127,107.796 C11.2 62.4,107.796 63.108,107.088 63.108,106.868 v1(63.145,106.83) 63.145,106.792 64.659,105.279 U5.5
  Top Layer w0.3: v1(54.8,113.215) 54.8,115.1 55.188,115.488 57.788,115.488 58.2,115.9 U1.1
  Bottom Layer w0.2: U7.11 35.65,107.729 36.079,107.3 36.079,106.747 35.8,106.468 v1(35.8,106.4) ; C7.2 47.396,124.6 47.196,124.4 v3(45.2,124.4) 46.565,123.035 49.665,123.035 U3.7 ; v1(51.85,123.65) C8.2 ; U8.4 69.4,114.332 69.3,114.432 v1(69.3,114.5) 69.753,114.953 69.753,115.053 70.2,115.5 U8.12
  Bottom Layer w0.254: U2.2 50.4,114.575 50.723,114.252 50.723,114.14 50.957,113.905 51.956,113.905 52.105,114.054 52.105,115.887 51.897,116.095 51.897,118.078 C5.2
  other v2: 59.95,117.55 58.85,118.65
I2C1_SCL: P10.8 R12.1 U7.7 | length 14.9
  Top Layer w0.127: v1(43.073,112.517) 43.662,112.517 R12.1
  Mid-Layer 1 w0.127: v1(43.073,112.517) 43.073,112.027 44.4,110.7 44.4,104.21 P10.8
  Mid-Layer 2 w0.127: v1(41.946,109.722) 42.008,109.784 42.008,110.109 42.1,110.201 42.1,110.512 42.368,110.78 42.368,111.229 42.1,111.497 42.1,111.545 v1(43.073,112.517)
  Bottom Layer w0.127: U7.7 40.971,109.701 41.924,109.701 v1(41.946,109.722)
I2C1_SCL_1V8: R16.1 U7.14 U8.2 | length 47.4
  Top Layer w0.254: v1(71.8,111.6) 71.842,111.6 72.692,110.75 R16.1
  Mid-Layer 2 w0.254: v1(36.7,109.506) 36.7,109.453 37.065,109.088 37.065,108.835 40.933,104.967 70.067,104.967 71.4,106.3 71.4,111.147 71.8,111.547 v1(71.8,111.6)
  Bottom Layer w0.254: U7.14 36.474,109.679 36.647,109.506 v1(36.7,109.506) ; U8.2@71,113 71,112.4 v1(71.8,111.6)
I2C1_SCL_STM: 
I2C1_SDA: P10.9 R13.1 U7.8 | length 10.8
  Top Layer w0.127: v1(43.443,108.941) 43.443,109.028 43.649,109.235 43.649,109.774 R13.1
  Mid-Layer 1 w0.127: P10.9 45.06,105.451 44.975,105.451 44.657,105.769 44.657,106.219 44.975,106.537 45.06,106.537 v1(45.06,108.44)
  Mid-Layer 2 w0.127: v1(42.071,109.029) 42.115,108.985 43.301,108.985 v1@43.394,108.892 ; v1(43.443,108.941) v1@43.394,108.892 ; v1(45.06,108.44) 43.943,108.44 43.491,108.892 v1@43.394,108.892
  Bottom Layer w0.127: U7.8 v1(42.071,109.029)
I2C1_SDA_1V8: R17.1 U7.13 U8.3 | length 44.1
  Top Layer w0.254: v1(70.225,111.568) 70.262,111.53 70.262,110.788 R17.1
  Mid-Layer 2 w0.254: v1(37.855,108.983) 37.855,108.903 39.147,107.611 39.147,107.501 41.3,105.348 67.699,105.348 68.6,106.249 68.6,110.261 69.234,110.896 69.553,110.896 v1(70.225,111.568)
  Bottom Layer w0.254: U7.13 36.32,109.029 36.449,108.9 37.852,108.9 37.855,108.903 v1(37.855,108.983) ; U8.3@70.212,113.2 70.212,111.58 v1(70.225,111.568)
I2C1_SDA_STM: 
NetANT1_1: 
NetC2_1: C2.1 L1.2 U1.27 U1.28 | length 21.1
  Top Layer w0.2: v1@56.647,116.9 U1.28 ; v1@56.669,116.991 56.669,117.158 56.811,117.3 U1.27@57.177,117.3
  Top Layer w0.254: L1.2 45.621,114.163 v1(47.494,114.163) ; v1(52.997,114.7) 53.385,114.7 55.585,116.9 v1@56.647,116.9 ; v1@56.578,116.9 v1@56.669,116.991
  Mid-Layer 2 w0.254: v1(47.494,114.163) 48.101,114.163 48.227,114.037 52.333,114.037 v1(52.997,114.7)
  Bottom Layer w0.254: v1(56.633,116.9) 56.633,116.467 60.05,113.05 C2.1
NetC2_2: C2.2 U1.6 | length 1.6
  Top Layer w0.127: v1(60.2,115.2) U1.6
  Bottom Layer w0.254: C2.2 v1(60.2,115.2)
NetC4_2: C4.2 P1.1 U1.20 U1.21 | length 31.6
  Top Layer w0.2: U1.21 58.2,120.574 58.33,120.704 v1(58.33,120.767) ; v1@58.458,120.831 58.6,120.689 U1.20
  Top Layer w0.254: P1.1 34.854,123.296 v1(38.504,123.296)
  Bottom Layer w0.254: v1(38.504,123.296) 40.808,125.6 52.4,125.6 53.5,124.5 53.5,122.2 54.7,121 57.307,121 57.54,120.767 v1(58.33,120.767) ; v1@58.33,120.837 58.344,120.851 58.344,121.677 58.527,121.86 C4.2
NetC10_2: C10.2 U1.10 | length 3.3
  Top Layer w0.2: U1.10@61.623,117.7 62.278,117.7 v1@62.581,117.397
  Top Layer w0.254: v1@62.581,117.397 v1(62.614,117.43)
  Mid-Layer 2 w0.254: v1(62.614,117.43) 62.577,117.467 62.577,117.863 62.531,117.909 62.531,118.163 v1(63.357,118.99)
  Bottom Layer w0.254: C10.2 63.25,118.985 63.255,118.99 v1(63.357,118.99)
NetC19_2: 
NetC20_2: 
NetC21_2: 
NetC33_1: 
NetD1_1: 
NetJ1_4: J1.4 R6.1 | length 4
  Top Layer w0.127: J1.4 51.45,106.25 R6.1
NetJ2_1: J2.1 R15.2 | length 3.1
  Top Layer w0.127: J2.1 33.51,113.65 33.903,114.042 35.412,114.042 35.75,113.704 R15.2
NetL1_1: L1.1 U1.25 U1.26 | length 15.2
  Top Layer w0.2: U1.26 57.049,117.7 56.849,117.9 56.851,117.902 57.049,118.1 U1.25
  Top Layer w0.254: L1.1 44.516,119.5 v1(47.4,119.5) ; v1(52.521,117.485) 53.159,117.485 53.174,117.5 56.1,117.5 56.502,117.902 56.851,117.902
  Mid-Layer 2 w0.254: v1(47.4,119.5) 51.004,119.5 52.521,117.983 v1(52.521,117.485)
NetL4_1: 
NetQ1_2: Q1.2 U1.5 | length 4.5
  Top Layer w0.127: Q1.2 58.521,114.021 59.657,115.157 59.657,115.425 59.763,115.531 59.763,116.139 U1.5
NetR4_2: R4.2 U1.13 | length 2.7
  Top Layer w0.2: U1.13 62.5,118.9 62.718,119.118 62.718,119.237 63.077,119.596 R4.2@63.277,119.596
  Top Layer w0.254: R4.2@63.277,119.596 63.45,119.769 R4.2
NetR5_2: R5.2 U1.11 | length 2.6
  Top Layer w0.2: U1.11 62.854,118.1 63.25,117.704 R5.2@63.25,117.504
  Top Layer w0.254: R5.2@63.25,117.504 63.25,117.554 R5.2
NetR7_1: R7.1 U1.14 | length 4.5
  Top Layer w0.2: U1.14 62.245,119.3 62.362,119.417 v1@62.362,119.888
  Top Layer w0.254: v1@62.362,119.889 v1(62.4,119.889) ; v1(62.4,122) R7.1
  Bottom Layer w0.254: v1(62.4,119.889) v1(62.4,122)
NetR8_2: R8.2 RT1.2 U1.16 | length 12.4
  Top Layer w0.2: 59.727,121.373 60.2,120.9 U1.16
  Top Layer w0.254: R8.2 59.1,122 59.727,121.373 68.573,121.373 RT1.2
NetR9_1: R9.1 U1.7 | length 2.2
  Top Layer w0.127: R9.1 60.6,114.781 60.742,114.924 60.742,115.425 60.6,115.567 U1.7
NetR10_1: R10.1 U1.15 | length 3.4
  Top Layer w0.2: U1.15 60.6,120.278 v1@61,120.678
  Top Layer w0.254: R10.1 60.672,121.989 61.677,121.989 v1(61.688,121.979) ; v1@61,120.678 61,120.7 v1(61.017,120.717)
  Bottom Layer w0.254: v1(61.017,120.717) 61.688,121.388 v1(61.688,121.979)
NetR11_2: 
NetU8_1,7,8,14: 
OSC32_IN: 
OSC32_OUT: 
OSC_IN: 
OSC_OUT: 
SPI1_MOSI: P10.6 U7.4 | length 12.1
  Mid-Layer 1 w0.127: P10.6 41.25,105.45 42.038,106.238 42.784,106.238 43.985,107.439 43.985,110.756 43.737,111.004 v1(42.91,111.004)
  Bottom Layer w0.127: U7.4 42.197,111.629 42.823,111.004 v1(42.91,111.004)
SPI1_MOSI_STM: 
SPI1_NSS: P10.5 U7.6 | length 9.9
  Mid-Layer 1 w0.127: P10.5 39.98,104.68 41.49,106.19 41.49,106.731 42.9,108.141 v1(42.9,110.3)
  Bottom Layer w0.127: U7.6 40.965,110.315 42.885,110.315 v1(42.9,110.3)
SPI1_NSS_STM: 
SPI1_SCK: P10.2 U7.5 | length 12.4
  Mid-Layer 1 w0.127: P10.2 37.965,105.395 39.795,105.395 42.613,108.213 42.613,109.82 42.357,110.075 42.357,110.472 v1(41.825,111.005)
  Bottom Layer w0.127: U7.5 40.963,110.992 41.812,110.992 v1(41.825,111.005)
SPI1_SCK_STM: 
USART1_RX_STM: 
USART1_TX_STM: 
USB_N: P3.1 U2.1 | length 1.5
  Bottom Layer w0.127: U2.1 49.45,115.75 P3.1
USB_P: P3.2 U2.3 | length 1.4
  Bottom Layer w0.127: P3.2 51.113,116.057 51.113,115.011 U2.3
USBIN_N: J1.2 U2.6 | length 6.4
  Top Layer w0.127: v1(49.976,110.499) v1@50.022,110.499 ; v1@50.023,110.5 50.05,110.473 J1.2
  Bottom Layer w0.127: U2.6 49.686,111.789 49.686,111.566 49.836,111.416 49.991,111.261 50.143,111.261 50.218,111.187 50.218,110.813 49.976,110.571 v1(49.976,110.499)
USBIN_P: J1.3 U2.4 | length 6.5
  Top Layer w0.127: v1(50.68,110.508) 50.689,110.5 50.727,110.5 50.7,110.473 J1.3
  Bottom Layer w0.127: v1(50.68,110.508) 50.68,110.563 50.472,110.771 50.472,111.187 50.546,111.261 50.809,111.261 51.113,111.566 51.113,111.789 U2.4
USBSTM_N: 
USBSTM_P: 
USER_BTN: P10.7 S3.1 | length 14.7
  Mid-Layer 2 w0.127: S3.1 30.187,103.713 30.187,103.114 30.527,102.773 40.225,102.773 42.173,102.773 42.399,102.999 42.399,103.479 P10.7
USER_BTN_STM: 
VL: C9.1 R1.2 R2.2 R3.2 R8.1 U1.9 | length 26.6
  Top Layer w0.2: U1.9@61.623,117.3 61.888,117.3 v1(62.557,116.631)
  Top Layer w0.254: R2.2@55.296,123.5 R2.2 55.6,123.654 v1(55.6,124.2) ; R3.2 55.35,119.45 55.862,119.962 56.062,119.962 v1(56.1,120) ; R8.1 58.171,123.5 58.662,123.992 58.662,124.129 v1(58.7,124.167) ; v1(64.7,113.6) 64.7,114.75 R1.2@64.75,114.8
  Mid-Layer 1 w0.254: v1(55.6,124.2) 55.594,124.194 54.994,124.194 54.6,123.8 54.6,121.5 v1(56.1,120) 58.219,117.881 58.219,117.281 58.869,116.631 v1(62.557,116.631)
  Bottom Layer w0.254: v1(55.6,124.2) 58.667,124.2 v1(58.7,124.167) ; v1(62.557,116.631) 62.594,116.593 63.079,116.593 63.25,116.422 63.25,115.05 v1(64.7,113.6)
VSys: C3.2 C5.1 C6.1 C11.1 C12.1 C15.1 C16.1 U1.23 U1.24 U3.1 U3.6 U4.3 U4.4 U5.3 U5.4 | length 45
  Top Layer w0.2: v1(56.562,118.557) 56.619,118.5 U1.24 ; v1@56.6,118.595 56.6,118.698 56.802,118.9 U1.23@57.177,118.9
  Top Layer w0.254: v1(56.562,118.557) v1@56.6,118.595 ; v1(56.842,110.658) C12.1 56.992,109.296 57.596,109.9 59.37,109.9 ; U4.4 59.221,109.751 59.37,109.9 ; U4.3 59.871,109.751 59.722,109.9 ; v1(61.146,106.879) 61.146,106.134 61.1,106.088 61.1,105.396 61.804,104.691 C16.1 62.104,104.691 62.696,104.1 64.5,104.1 ; C11.1 62.204,109.25 61.419,109.25 61.153,108.984 v1(61.1,108.984) 61.1,109.7 60.9,109.9 59.722,109.9 ; U5.3 64.334,104.266 64.5,104.1 ; U5.4 64.984,104.284 64.8,104.1 ; C15.1 67.213,104.691 66.621,104.1 64.8,104.1 ; 59.37,109.9 59.722,109.9 ; 64.5,104.1 64.8,104.1
  Bottom Layer w0.254: U3.1 48.3,120.42 48.3,120.1 48.9,119.5 50.3,119.5 ; C6.1 C5.1 50.304,119.496 50.3,119.5 ; C3.2@55.3,117.75 C3.2@55.35,117.7 ; v1(56.842,110.658) 56.027,111.473 56.027,118.477 56.07,118.52 56.525,118.52 v1(56.562,118.557) 53.143,118.557 52.263,119.437 52.263,119.497 51.31,120.45 U3.6 50.81,120.45 50.737,120.377 50.737,119.937 50.3,119.5 ; v1(61.1,108.984) 61.1,107.612 61.146,107.566 v1(61.146,106.879)
Vusb: C1.2 J1.1 Q1.1 U1.3 U1.4 U2.5 | length 35.4
  Top Layer w0.2: 59,115.5 59.283,115.5 59.4,115.617 U1.4 ; 59,115.6 U1.3
  Top Layer w0.254: v1(47.379,116.536) 48.006,117.163 48.006,120.471 47.873,120.604 47.873,122.101 C1.2@47.425,122.549 ; J1.1 49.4,107.675 49.2,107.875 49.2,112.3 50.4,113.5 52.7,113.5 54.529,111.671 Q1.1 55.8,114.383 56.466,115.049 58.549,115.049 58.814,115.314 59,115.5 ; v1@50.365,113.465 v1(50.4,113.431)
  Bottom Layer w0.254: v1(47.379,116.536) 46.929,116.086 46.929,115.875 49.304,113.5 50.4,113.5 U2.5
pads on no net: U1.19 U3.3 U3.5 U8.1 U8.5 U8.6 U8.7 U8.8 U8.14
copper on no net: | length 34.1
  Top Layer w0.127: 74,125.65 74,125.9 74,126.55 ; 73.5,125.6 73.5,126.6 ; 73.5,125.6 73.174,125.6 73.1,125.674 73.1,126.526 73.174,126.6 73.5,126.6 ; 73.5,125.6 74,125.6 74.5,125.6 ; 73.5,126.6 74,126.6 74.5,126.6 ; 74.5,125.6 74.5,126.6 ; 74.5,125.6 74.926,125.6 75,125.674 75,126.526 74.926,126.6 74.5,126.6
  Mid-Layer 1 w0.127: 74,125.65 74,125.9 74,126.55 ; 73.5,125.6 73.5,126.6 ; 73.5,125.6 73.174,125.6 73.1,125.674 73.1,126.526 73.174,126.6 73.5,126.6 ; 73.5,125.6 74,125.6 74.5,125.6 ; 73.5,126.6 74,126.6 74.5,126.6 ; 74.5,125.6 74.5,126.6 ; 74.5,125.6 74.926,125.6 75,125.674 75,126.526 74.926,126.6 74.5,126.6
  Mid-Layer 2 w0.127: 74,125.65 74,125.9 74,126.55 ; 73.5,125.6 73.5,126.6 ; 73.5,125.6 73.174,125.6 73.1,125.674 73.1,126.526 73.174,126.6 73.5,126.6 ; 73.5,125.6 74,125.6 74.5,125.6 ; 73.5,126.6 74,126.6 74.5,126.6 ; 74.5,125.6 74.5,126.6 ; 74.5,125.6 74.926,125.6 75,125.674 75,126.526 74.926,126.6 74.5,126.6
  Bottom Layer w0.127: 74,125.65 74,125.9 74,126.55 ; 73.5,125.6 74,125.6 74.5,125.6 ; 73.5,125.6 73.174,125.6 73.1,125.674 73.1,126.526 73.174,126.6 73.5,126.6 ; 73.5,125.6 73.5,126.6 ; 73.5,126.6 74,126.6 74.5,126.6 ; 74.5,125.6 74.926,125.6 75,125.674 75,126.526 74.926,126.6 74.5,126.6 ; 74.5,125.6 74.5,126.6
  other v1: 53,120.2

## Polygon pours and split planes (outlines as drawn)
GND on Bottom Layer "GND_L04_P001" (solid, remove dead copper, pour order 1): 25.7,126.7 75.1,126.7 75.1,102.3 25.7,102.3
GND on Top Layer "GND_L01_P000" (solid, remove dead copper, pour order 0): 25.7,126.7 75.1,126.7 75.1,102.3 25.7,102.3

## Keep-outs
Top Layer:
  rectangle: 73,125.5 75.1,126.7
Bottom Layer:
  rectangle: 73,125.5 75.1,126.7

## Other copper
Top Layer:
  text "1" at 73.2,125.9 h0.64
Mid-Layer 1:
  text "2" at 73.599,125.9 h0.64
Mid-Layer 2:
  text "3" at 74.4,125.907 h0.64
Bottom Layer:
  text "4" at 74.9,125.9 h0.64

## Silkscreen, mask and mechanical layers (free items; w line width, h text height)
Top Solder:
  text "Made By /  / Lieselotte Verhulst /  / And /  / Glenn Adriaensens" at 28.7,120.1 h0.64
Board Shape:
  lines w0.4: 25.4,102 75.4,102 75.4,127 25.4,127 25.4,102

## Text inside footprints (layer, text, board x,y; h text height)
J1: Mechanical 6 "PCB EDGE" at 43.5,101.9 h0.3
J2: Top Overlay "8" at 33.11,109.6 h1.02 r270; Top Overlay "1" at 33.11,114.5 h1.02 r270